# Altium PCB PCB1.PcbDoc
Units mm, origin at the board's own origin, x right, y up, seen from the top; angles counter-clockwise.
Board outline 152.4 x 101.6 mm, 2 copper layers (Top Layer, Bottom Layer); 32 components, 19 nets, 135 pads, 233 vias.
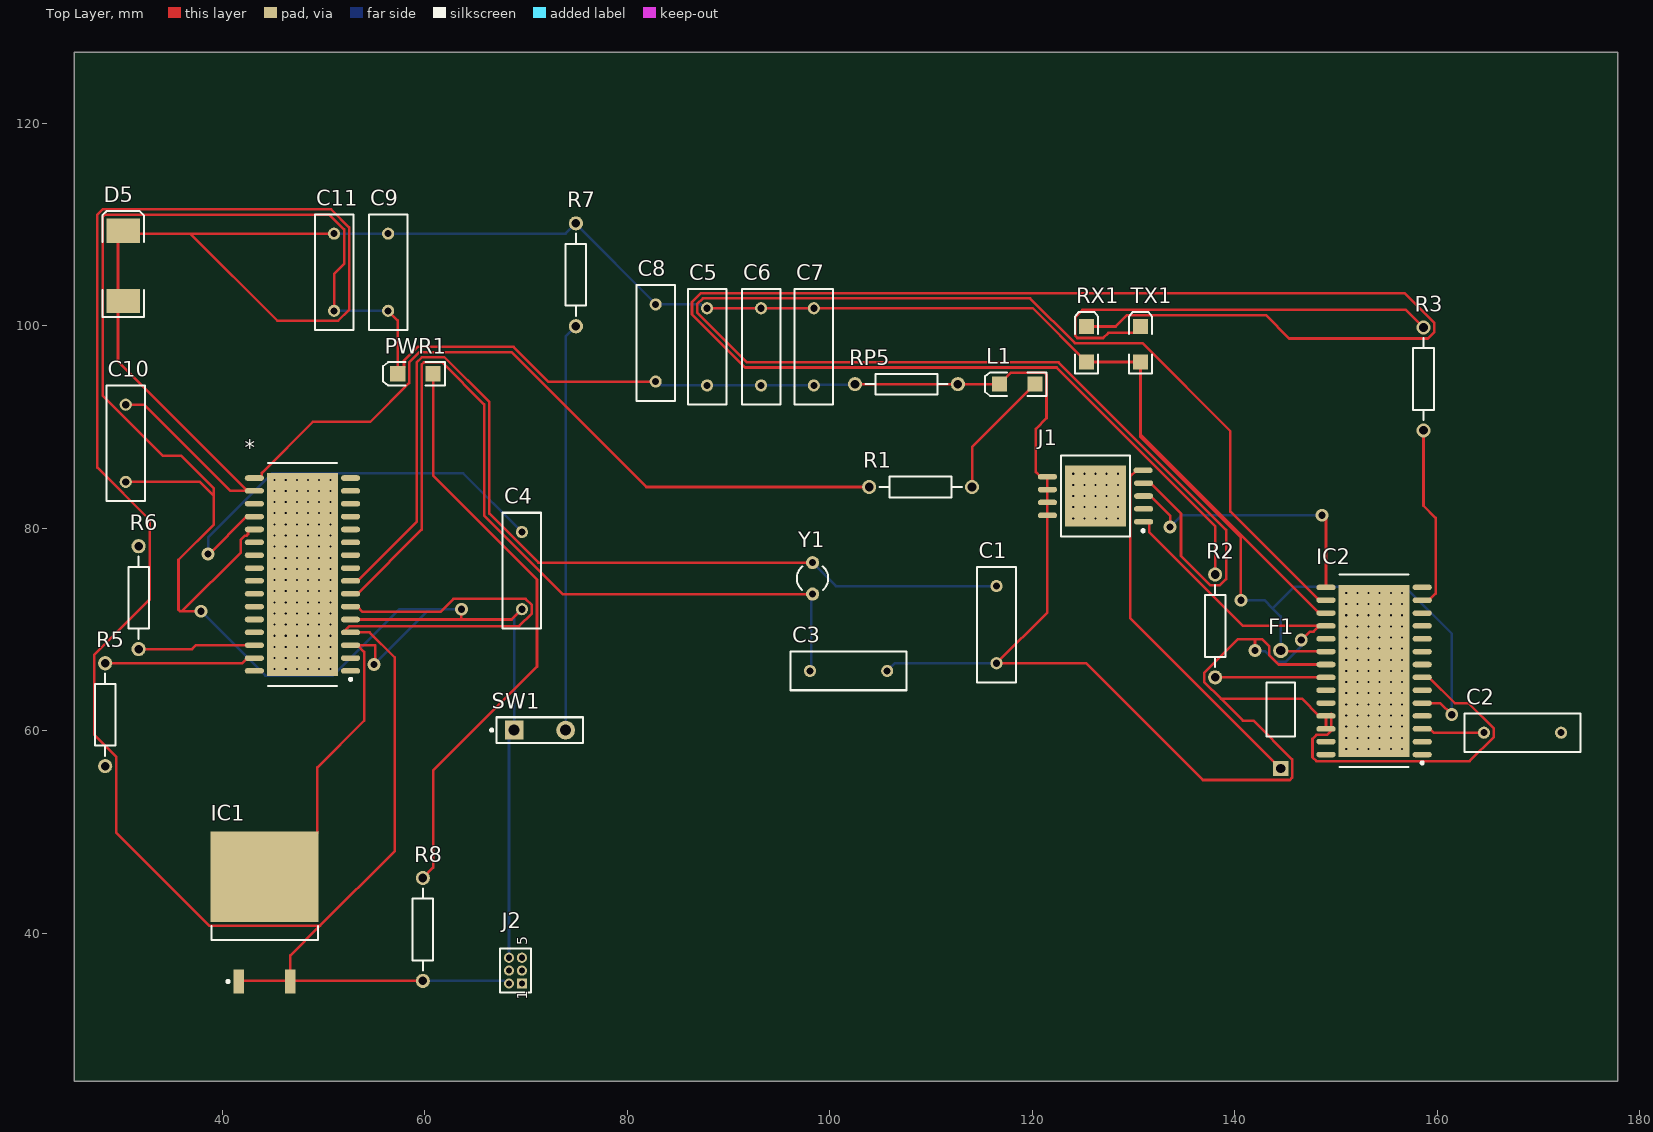
[diagram p0: Top Layer view]
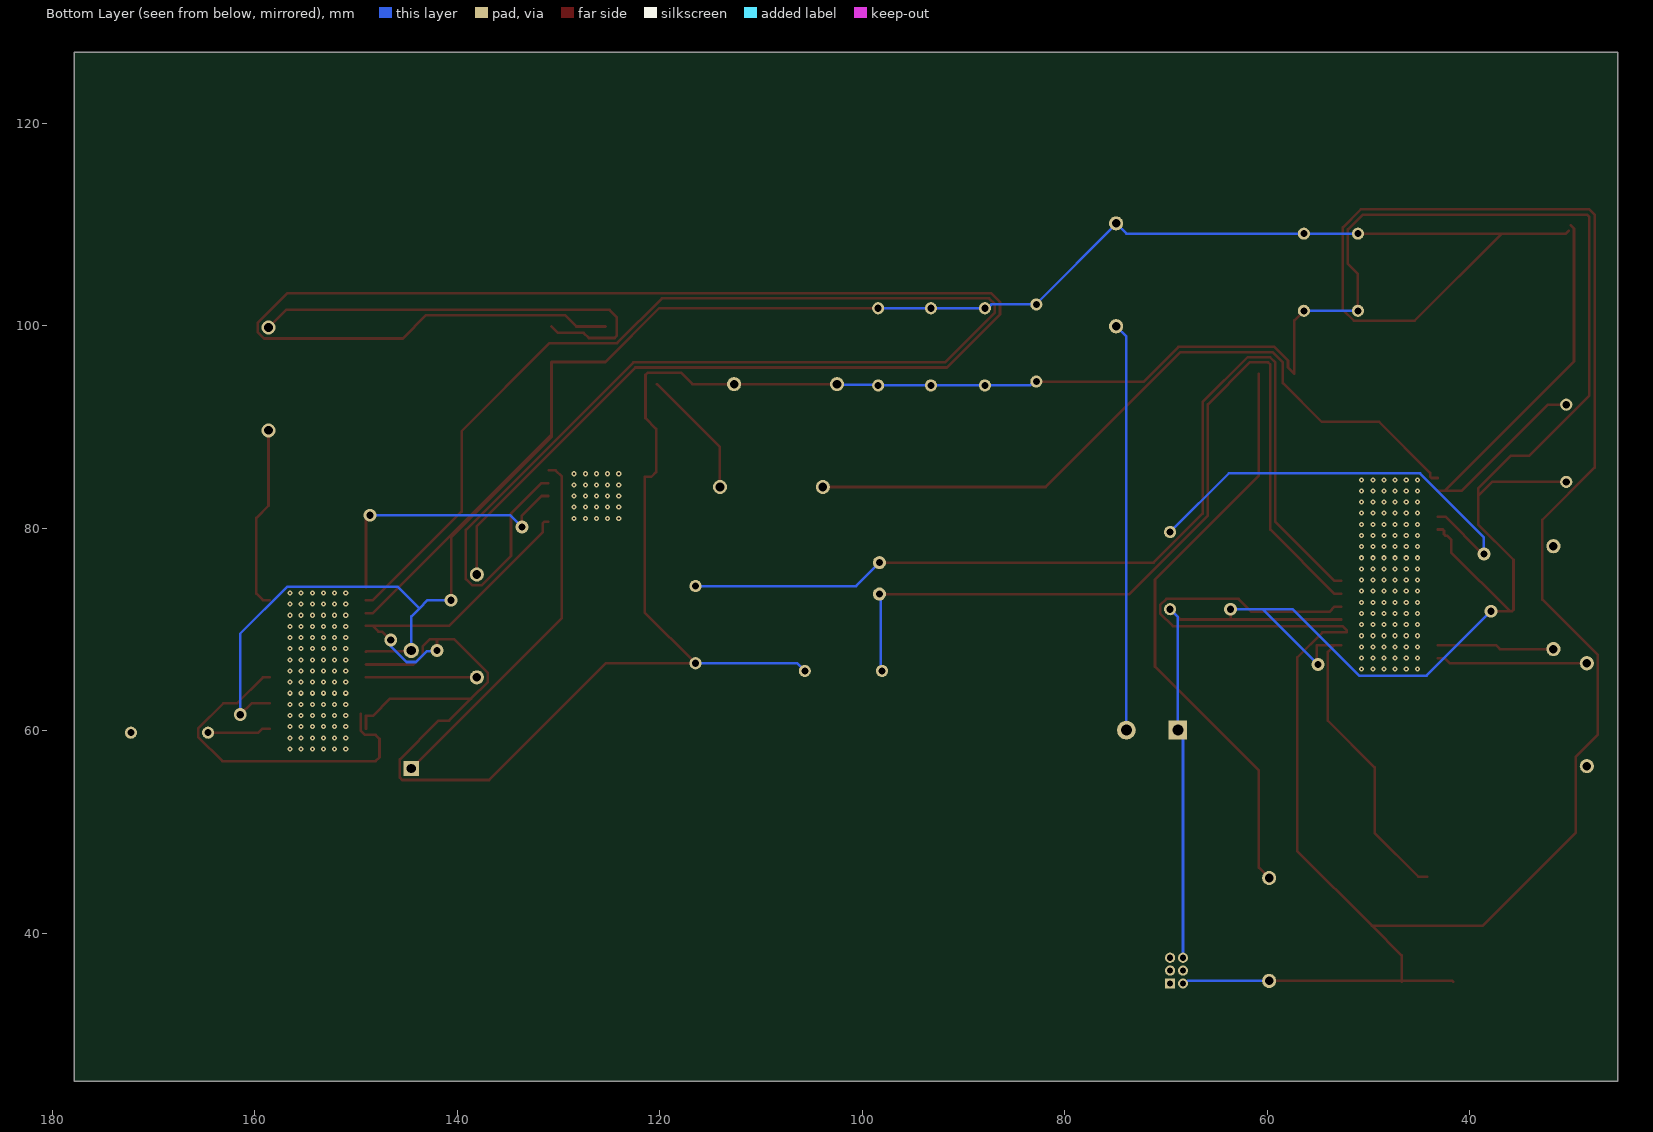
[diagram p1: Bottom Layer view, seen from below]

## Layer stack, top to bottom
Top Solder: solder mask 0.0102, Solder Resist, Dk 3.5
Top Layer: signal copper 0.0356
Dielectric 1: dielectric 0.32, FR-4, Dk 4.8
Bottom Layer: signal copper 0.0356
Bottom Solder: solder mask 0.0102, Solder Resist, Dk 3.5

## Board outline
25.4,25.4 177.8,25.4 177.8,127 25.4,127

## Design rules (kind name [scope] priority, off if disabled: settings)
Clearance "Stitching No Net_1" [IsStitchingVia and InNet('No Net') vs (IsVia and (Not IsStitchingVia)) Or IsPad] p1: gap=0.127 ignorepadtopadclearanceinfootprint=FALSE
Clearance "Stitching No Net" [IsStitchingVia and InNet('No Net') vs (IsVia and (Not IsStitchingVia)) Or IsPad] p2: gap=0.127 ignorepadtopadclearanceinfootprint=FALSE
Clearance [All] p3: gap=0.254 ignorepadtopadclearanceinfootprint=FALSE except(0: Arc-Hole Track-Hole SMDPad-Hole THPad-Hole Via-Hole Fill-Hole Poly-Hole Region-Hole Text-Hole)
MinimumSolderMaskSliver [All] p1: minsoldermaskwidth=0.025
PolygonConnect [All] p1: connectstyle=Relief reliefconductorwidth=0.254 reliefentries=4 polygonreliefangle="90 Angle" airgapwidth=0.254
RoutingVias [All] p1: holewidth=0.711 width=1.27 viastyle="Through Hole" minholewidth=0.711 minwidth=1.27 maxholewidth=0.711 maxwidth=1.27
SilkToSilkClearance [All] p1: silktosilkclearance=0.127
SilkToSolderMaskClearance [IsPad] p1: minsilkscreentomaskgap=0.127 clearancetoexposedcopper=TRUE
SolderMaskExpansion [All] p1: expansion=0.102 istentingtop=FALSE
Width [All] p1: maxlimit=0.254 minlimit=0.254 preferedwidth=0.254
27 further rules are at their usual default settings.

## Components (designator, comment, footprint, x,y, rotation, side; value= is the part's Value field where it differs from the comment)
* "ATMEGA328P-AU" SOIC127P980X95_HS-33N 47.93,75.438 r180 top
C1 "Cap" RAD-0.3 116.459,70.485 r90 top value=100pF
C2 "Cap" RAD-0.3 168.402,59.817 r180 top value=100pF
C3 "Cap" RAD-0.3 101.854,65.913 r180 top value=100pF
C4 "Cap" RAD-0.3 69.596,75.819 r90 top value=100pF
C5 "Cap" RAD-0.3 87.884,97.917 r90 top value=100pF
C6 "Cap" RAD-0.3 93.218,97.917 r90 top value=100pF
C7 "Cap" RAD-0.3 98.425,97.917 r90 top value=100pF
C8 "Cap" RAD-0.3 82.804,98.298 r90 top value=100pF
C9 "Cap" RAD-0.3 56.388,105.283 r90 top value=100pF
C10 "Cap" RAD-0.3 30.48,88.392 r90 top value=100pF
C11 "Cap" RAD-0.3 51.054,105.283 r90 top value=100pF
D5 "Diode" SMC 30.226,105.918 r90 top
F1 "Fuse 1" PIN-W2/E2.8 144.526,62.103 r90 top
IC1 "Volt Reg" D2PAK_N 44.196,42.043 r90 top
IC2 "Component_1" SOIC127P980X95_HS-29N 153.746,65.913 r180 top
J1 "MF-MSMF050-2" SOIC127P980X95_HS-10N 126.238,83.185 r180 top
J2 "MHDR2X3" MHDR2X3 69.596,35.052 r90 top
L1 "Yellow" 3.2X1.6X1.1 118.519,94.234 r180 top
PWR1 "GREEN" 3.2X1.6X1.1 59.083,95.25 r180 top
R1 "Res2" AXIAL-0.4 108.966,84.074 r180 top value=1K
R2 "Res2" AXIAL-0.4 138.049,70.358 r90 top value=1K
R3 "Res2" AXIAL-0.4 158.623,94.742 r90 top value=1K
R5 "Res2" AXIAL-0.4 28.448,61.595 r90 top value=1K
R6 "Res2" AXIAL-0.4 31.75,73.152 r270 top value=1K
R7 "Res2" AXIAL-0.4 74.93,105.029 r90 top value=1K
R8 "Res2" AXIAL-0.4 59.817,40.386 r90 top value=1K
RP5 "Res2" AXIAL-0.4 107.569,94.234 r180 top value=1K
RX1 "RED" 3.2X1.6X1.1 125.349,98.171 r90 top
SW1 "RESET" SPST-2 71.374,60.071 r0 top
TX1 "GREEN" 3.2X1.6X1.1 130.683,98.171 r90 top
Y1 "16MHz" R38 98.298,75.057 r180 top

## Footprints (in the part's own frame and the unit in brackets; to place one, negate y for a bottom-side part, rotate by r counter-clockwise, add the part's x,y. Pads: shape width x height; smd on the part's side, far side on the other; paste and mask are expansions set on the pad)
3.2X1.6X1.1 [mm] "SMT LED; 2 Flat Leads"
  rect 1.5x1.5 smd: 1(-1.75,0) 2(1.75,0)
  silkscreen extent -2.9,-1.15 3.2,1.15
AXIAL-0.4 [mm] "Axial Device, Thru-Hole; 2 Leads; 0.4 in Pin Spacing"
  round 1.4 hole 0.85: 1(-5.08,0) 2(5.08,0)
  silkscreen extent -4.06,-1.02 4.06,1.02
D2PAK_N [mm] "D2-PAK, 4-Leads, Body 8.8x10.4mm, Pitch 2.54mm, Lead Span 15.1mm, IPC Medium Density"
  rect 2.4x1.05 smd: 1(-6.8,2.54) 3(-6.8,-2.54)
  rect 8.9x10.65 smd: 2(3.55,0)
  silkscreen extent -6.92,-5.25 -1.3,5.25, body extent -2.7,-5.28 6.3,5.28, height 4.69
MHDR2X3 [mm] "Connector; Header; 3x2 Position"
  rect 1x1 hole 0.6: 1(0,0)
  round 1 hole 0.6: 2(0,1.27) 3(1.27,0) 4(1.27,1.27) 5(2.54,0) 6(2.54,1.27)
  silkscreen extent -0.9,-0.9 3.44,2.17
PIN-W2/E2.8 [mm] "Thru-Hole; 2 Leads"
  rect 1.5x1.5 hole 0.9: 1(-5.825,0)
  round 1.5 hole 0.9: 2(5.825,0)
  silkscreen extent -2.65,-1.4 2.65,1.4
R38 [mm] "Crystal, Thru-Hole; 2 Leads; Body 3.1 x 8.2 mm (Dia.xH)"
  round 1.3 hole 0.7: 1(0,1.55) 2(0,-1.55)
  silkscreen extent -1.55,-1.19 1.55,1.17
RAD-0.3 [mm] "Radial Cap, Thru-Hole; 2 Leads; 0.3 in Pin Spacing"
  round 1.2 hole 0.7: 1(-3.81,0) 2(3.81,0)
  silkscreen extent -5.71,-1.91 5.71,1.91
SMC [mm] "DO-214-AB/SMC; 2 C-Bend Leads; Body 7.9 x 5.9 mm, inc. leads (LxW)"
  rect 2.4x3.3 smd: 1(-3.475,0) 2(3.475,0)
  silkscreen extent -5.07,-2.05 5.43,2.05
SOIC127P980X95_HS-10N [mm] "SOIC, 9-Leads, Body 7.00x7.30mm, Pitch 1.27mm, Thermal Pad 6.00x6.00mm, IPC Medium Density"
  oval 1.9x0.55 smd: 1(-4.75,2.54) 2(-4.75,1.27) 3(-4.75,0) 4(-4.75,-1.27) 5(-4.699,-2.54) 6(4.75,-1.905) 7(4.75,-0.635) 8(4.75,0.635) 9(4.75,1.905)
  rect 6x6 smd: 10(0,0)
  silkscreen extent -4.82,-4 3.4,4, body extent -4.91,-4 4.91,4, height 1.05
SOIC127P980X95_HS-29N [mm] "SOIC, 28-Leads, Body 17.00x7.30mm, Pitch 1.27mm, Thermal Pad 17.00x7.00mm, IPC Medium Density"
  oval 1.9x0.55 smd: 1(-4.75,8.255) 2(-4.75,6.985) 3(-4.75,5.715) 4(-4.75,4.445) 5(-4.75,3.175) 6(-4.75,1.905) 7(-4.75,0.635) 8(-4.75,-0.635) 9(-4.75,-1.905) 10(-4.75,-3.175) 11(-4.75,-4.445) 12(-4.75,-5.715) 13(-4.75,-6.985) 14(-4.75,-8.255) 15(4.75,-8.255) 16(4.75,-6.985) 17(4.75,-5.715) 18(4.75,-4.445) 19(4.75,-3.175) 20(4.75,-1.905) 21(4.75,-0.635) 22(4.75,0.635) 23(4.75,1.905) 24(4.75,3.175) 25(4.75,4.445) 26(4.75,5.715) 27(4.75,6.985) 28(4.75,8.255)
  rect 7x17 smd: 29(0,0)
  silkscreen extent -4.88,-9.5 3.4,9.5, body extent -4.91,-9.5 4.91,9.5, height 1.05
SOIC127P980X95_HS-33N [mm] "SOIC, 32-Leads, Body 19.50x7.30mm, Pitch 1.27mm, Thermal Pad 20.00x7.00mm, IPC Medium Density"
  oval 1.9x0.55 smd: 1(-4.75,9.525) 2(-4.75,8.255) 3(-4.75,6.985) 4(-4.75,5.715) 5(-4.75,4.445) 6(-4.75,3.175) 7(-4.75,1.905) 8(-4.75,0.635) 9(-4.75,-0.635) 10(-4.75,-1.905) 11(-4.75,-3.175) 12(-4.75,-4.445) 13(-4.75,-5.715) 14(-4.75,-6.985) 15(-4.75,-8.255) 16(-4.75,-9.525) 17(4.75,-9.525) 18(4.75,-8.255) 19(4.75,-6.985) 20(4.75,-5.715) 21(4.75,-4.445) 22(4.75,-3.175) 23(4.75,-1.905) 24(4.75,-0.635) 25(4.75,0.635) 26(4.75,1.905) 27(4.75,3.175) 28(4.75,4.445) 29(4.75,5.715) 30(4.75,6.985) 31(4.75,8.255) 32(4.75,9.525)
  rect 7x20 smd: 33(0,0)
  silkscreen extent -4.88,-11 3.4,11, body extent -4.91,-11 4.91,11, height 1.05
SPST-2 [mm] "Switch; 2 Leads"
  rect 1.85x1.85 hole 1.1: 1(-2.54,0)
  round 1.85 hole 1.1: 2(2.54,0)
  silkscreen extent -4.89,-1.27 4.28,1.27

## Part data
C1 C2 C3 C4 C5 C6 C7 C8 C9 C10 C11: "Capacitor", LatestRevisionDate=17-Jul-2002, LatestRevisionNote="Re-released for DXP Platform.", PackageDescription="Radial Cap, Thru-Hole; 2 Leads; 0.3 in Pin Spacing", PackageReference=RAD-0.3, Published=8-Jun-2000, Publisher="Altium Limited"
D5: "Default Diode", Code_JEDEC=DO-214-AB, LatestRevisionDate=17-Jul-2002, LatestRevisionNote="Re-released for DXP Platform.", PackageDescription="DO-214-AB/SMC; 2 C-Bend Leads; Body 7.9 x 5.9 mm, inc. leads (LxW)", PackageReference=SMC, PackageVersion=Sep-1996, Published=8-Jun-2000, Publisher="Altium Limited"
F1: "Fuse", LatestRevisionDate=17-Jul-2002, LatestRevisionNote="Re-released for DXP Platform.", PackageDescription="Thru-Hole; 2 Leads", PackageReference=PIN-W2/E2.8, Published=8-Jun-2000, Publisher="Altium Limited"
IC1: "Voltage Regulator", LatestRevisionDate=29-May-2009, LatestRevisionNote="IPC-7351 Footprint Added.", PackageDescription="3-Pin Transistor Outline Package 2.54 mm Pitch, 15.1 mm Lead Span", PackageReference=D2PAK, Published=24-Mar-1999, Publisher="Altium Limited"
J2: "Header, 3-Pin, Dual row", LatestRevisionDate=17-Jul-2002, LatestRevisionNote="Re-released for DXP Platform.", Publisher="Altium Limited"
L1 PWR1 RX1 TX1: library part LED2, "Typical RED, GREEN, YELLOW, AMBER GaAs LED", LatestRevisionDate=17-Jul-2002, LatestRevisionNote="Re-released for DXP Platform.", PackageDescription="SM LED; 2 Flat Leads", PackageReference=3.2X1.6X1.1, PackageVersion=Feb-2002, Published=8-Jun-2000, Publisher="Altium Limited"
R1 R2 R3 R5 R6 R7 R8 RP5: "Resistor", LatestRevisionDate=17-Jul-2002, LatestRevisionNote="Re-released for DXP Platform.", PackageDescription="Axial Device, Thru-Hole; 2 Leads; 0.4 in Pin Spacing", PackageReference=AXIAL-0.4, Published=8-Jun-2000, Publisher="Altium Limited"
SW1: library part SW-PB, "Switch", LatestRevisionDate=17-Jul-2002, LatestRevisionNote="Re-released for DXP Platform.", PackageDescription="Switch; 2 Leads", PackageReference=SPST-2, Published=24-Mar-1999, Publisher="Altium Limited"
Y1: library part XTAL, "Crystal Oscillator", LatestRevisionDate=17-Jul-2002, LatestRevisionNote="Re-released for DXP Platform.", PackageDescription="Crystal, Thru-Hole; 2 Leads; Body 3.1 x 8.2 mm (Dia.xH)", PackageReference=R38, Published=8-Jun-2000, Publisher="Altium Limited"

## Via types
v1: diameter 0.5, hole 0.2, Top Layer to Bottom Layer, 223 vias
v2: diameter 1.27, hole 0.711, Top Layer to Bottom Layer, 10 vias

## Nets (pads, with @x,y where several pads share a name; then routed paths per layer and width w, separated by ;. In a path a pad name is that pad's centre, name@x,y a point inside that pad or via, vN(x,y) a via of type N, cw(c..) or ccw(c..) an arc to the next point about the centre after c; other vN are vias at no path point)
+5: *.4 *.6 *.18 C5.2 C6.2 C7.2 C8.2 C9.2 C10.2 C11.2 D5.1 D5.2 F1.2 IC1.1 IC1.3 IC2.5 IC2.17 IC2.20 J2.2 R7.2 R8.1 RX1.1 TX1.1 | length 514.6
  Top Layer w0.254: D5.2@30.016,109.901 29.718,109.603 29.718,96.48 *.18@42.505,83.693 ; D5.2 30.526,109.093 36.841,109.093 ; C10.2 32.298,92.202 40.807,83.693 *.18@42.505,83.693 ; IC1.1 41.719,35.306 IC1.3@46.736,35.306 ; *.18 *.18@42.505,83.693 ; IC1.3 IC1.3@46.736,35.306 ; C11.2 36.841,109.093 ; *.6 53.355,72.263 53.863,71.755 61.566,71.755 62.836,73.025 69.967,73.025 70.577,72.415 70.577,71.603 69.311,70.337 52.576,70.337 52.172,69.933 52.172,69.723 54.566,69.723 57.023,67.266 57.023,48.106 49.679,40.762 ; R8.1 IC1.3@46.736,35.306 ; C5.2 C6.2 C7.2 120.043,101.727 RX1.1 TX1.1 130.683,89.266 ; v2(140.589,72.898) 140.589,79.113 130.683,89.019 130.683,89.266 ; F1.2 144.581,67.873 148.941,67.873 IC2.20 ; IC2.17 148.321,71.628 130.683,89.266 ; IC2.5 160.274,62.738 v2(161.417,61.595) ; 36.841,109.093 45.442,100.492 51.46,100.492 52.543,101.575 52.543,109.71 50.771,111.482 28.208,111.482 27.687,110.961 27.687,85.988 32.831,80.844 32.831,72.962 27.367,67.498 27.367,59.615 29.529,57.453 29.529,49.946 38.713,40.762 49.679,40.762 ; IC1.3@46.736,35.306 46.736,37.819 49.679,40.762
  Bottom Layer w0.254: C11.2 C9.2 73.914,109.093 R7.2 74.93,110.045 82.804,102.171 C8.2 87.247,102.108 87.628,101.727 C5.2 C6.2 C7.2 ; R8.1 67.87,35.306 68.124,35.052 J2.2 ; v2(140.589,72.898) 142.915,72.898 143.72,72.092 ; F1.2 144.526,71.287 143.72,72.092 ; v2(161.417,61.595) 161.417,69.584 156.757,74.244 145.872,74.244 143.72,72.092
GND: *.3 *.5 *.21 C1.1 C3.1 C4.1 C5.1 C6.1 C7.1 C8.1 C9.1 C10.1 C11.1 IC1.2 IC2.7 IC2.18 IC2.21 IC2.25 IC2.26 J1.1 J1.6 J1.7 J1.8 J1.9 J2.6 L1.2 PWR1.2 RP5.1 RP5.2 SW1.1 | length 491.8
  Top Layer w0.254: C10.1 37.806,84.582 39.188,83.2 ; v2@37.973,71.882 v2(37.903,71.812) 36.046,71.812 ; *.21 42.687,79.883 42.55,79.746 42.55,79.418 42.402,79.269 42.233,79.269 41.849,78.885 41.849,77.615 36.046,71.812 ; IC1.2 45.071,45.593 49.394,49.916 49.394,56.377 54.011,60.994 54.011,67.797 *.3@53.355,68.453 ; C11.1 51.054,105.124 52.035,106.105 52.035,109.499 50.56,110.974 28.418,110.974 28.195,110.751 28.195,93.1 34.116,87.179 35.928,87.179 39.188,83.918 39.188,83.2 ; *.3 *.3@53.355,68.453 ; *.5 63.5,70.993 ; v2(54.991,66.548) 55.118,66.675 55.118,68.453 *.3@53.355,68.453 ; C9.1 57.333,100.528 PWR1.2 57.956,95.873 57.956,96.567 59.294,97.905 68.766,97.905 72.183,94.488 C8.1 ; v2(63.627,72.009) 63.627,71.12 63.5,70.993 ; C4.1 68.58,70.993 63.5,70.993 ; RP5.2 RP5.1 L1.2 117.9,95.365 121.177,95.365 121.4,95.142 121.4,90.873 120.349,89.822 120.349,85.554 120.813,85.09 J1.6 J1.7 J1.8 J1.9 121.488,71.704 C1.1 125.31,66.675 136.838,55.147 145.434,55.147 145.657,55.37 145.657,57.186 141.835,61.008 140.79,61.008 138.621,63.177 ; J1.1 131.399,80.645 131.536,80.508 131.536,79.625 140.803,70.358 IC2.18@148.321,70.358 ; v2(141.986,67.945) 141.986,69.059 ; v2(146.558,68.961) 147.394,69.797 147.76,69.797 IC2.18@148.321,70.358 ; IC2.26 IC2.25 148.321,61.468 146.612,63.177 138.621,63.177 ; IC2.21 144.307,66.548 143.395,67.46 143.395,68.341 142.677,69.059 141.986,69.059 ; IC2.18 IC2.18@148.321,70.358 ; IC2.25@149.504,61.678 149.504,59.988 149.11,59.594 148.059,59.594 147.665,59.2 147.665,57.386 148.049,57.002 163.164,57.002 165.573,59.411 165.573,60.223 163.074,62.722 161.727,62.722 159.171,65.278 IC2.7 ; 36.046,71.812 35.836,71.812 35.687,71.961 35.687,76.892 39.188,80.393 39.188,83.2 ; 138.621,63.177 136.968,64.83 136.968,65.726 140.301,69.059 141.986,69.059
  Bottom Layer w0.254: v2(37.903,71.812) 44.258,65.457 50.941,65.457 57.493,72.009 60.452,72.009 ; C11.1 C9.1 ; v2(54.991,66.548) 60.452,72.009 ; v2(63.627,72.009) 60.452,72.009 ; J2.6 68.326,59.563 SW1.1 68.834,71.247 C4.1 ; C8.1 83.06,94.488 83.441,94.107 C5.1 C6.1 C7.1 98.489,94.17 102.425,94.17 RP5.2 ; C3.1 106.426,66.675 C1.1 ; v2(141.986,67.945) 142.078,67.853 143.002,67.853 144.058,66.797 144.994,66.797 146.558,68.361 v2@146.558,68.707
Net*_7: *.7 C3.2 Y1.1 | length 88.2
  Top Layer w0.254: *.7 53.355,73.533 59.702,79.88 59.702,96.158 59.925,96.381 61.741,96.381 65.878,92.244 65.878,81.242 73.612,73.507 Y1.1
  Bottom Layer w0.254: C3.2 98.171,66.04 98.171,73.38 Y1.1
Net*_8: *.8 C1.2 Y1.2 | length 97.9
  Top Layer w0.254: *.8 53.355,74.803 59.194,80.642 59.194,96.368 59.715,96.889 61.951,96.889 66.386,92.455 66.386,81.452 71.231,76.607 Y1.2
  Bottom Layer w0.254: Y1.2 100.61,74.295 C1.2
Net*_17: *.17 R1.2 | length 72.8
  Top Layer w0.254: *.17 43.775,84.963 43.912,85.1 43.912,85.458 48.973,90.519 54.641,90.519 58.464,94.342 58.464,96.357 59.504,97.397 68.556,97.397 81.879,84.074 R1.2
Net*_20: *.20 C4.2 | length 43.7
  Top Layer w0.254: v2(38.608,77.47) 38.742,77.47 42.425,81.153 *.20
  Bottom Layer w0.254: v2(38.608,77.47) 38.608,79.108 44.919,85.419 63.806,85.419 C4.2
Net*_30: *.30 R6.2 | length 11.6
  Top Layer w0.254: R6.2 37.024,68.072 37.405,68.453 *.30
Net*_31: *.31 R5.2 | length 14.9
  Top Layer w0.254: R5.2 41.997,66.675 42.505,67.183 *.31
NetC2_2: C2.2 IC2.3 | length 6.3
  Top Layer w0.254: IC2.3 159.251,60.198 159.632,59.817 C2.2
NetF1_1: F1.1 J1.5 | length 36.5
  Top Layer w0.254: J1.5 130.262,85.725 129.657,85.12 129.657,71.147 F1.1
NetIC2_13: IC2.13 R3.1 | length 18.2
  Top Layer w0.254: IC2.13 159.171,72.898 159.827,73.554 159.827,81.022 158.623,82.226 R3.1
NetIC2_15: IC2.15 J1.3 | length 27.3
  Top Layer w0.254: J1.3 131.663,83.185 133.604,81.244 v2(133.604,80.137) ; v2(148.59,81.28) 148.996,80.874 IC2.15
  Bottom Layer w0.254: v2(133.604,80.137) 134.747,81.28 v2(148.59,81.28)
NetIC2_16: IC2.16 J1.4 | length 161.1
  Top Layer w0.254: J1.4 131.663,84.455 134.68,81.438 134.68,77.278 137.601,74.357 138.497,74.357 139.13,74.99 139.13,79.853 122.602,96.381 91.843,96.381 86.903,101.321 86.903,102.133 87.478,102.708 119.78,102.708 124.206,98.282 130.861,98.282 139.563,89.58 139.563,81.656 148.321,72.898 IC2.16
NetIC2_22: IC2.22 R2.1 | length 10.9
  Top Layer w0.254: R2.1 IC2.22
NetL1_1: L1.1 R1.1 | length 12.7
  Top Layer w0.254: R1.1 114.046,88.011 L1.1
NetPWR1_1: PWR1.1 R8.2 | length 58.7
  Top Layer w0.254: R8.2 60.833,46.482 60.833,56.096 71.085,66.348 71.085,74.946 60.833,85.198 PWR1.1
NetR2_2: R2.2 RX1.2 | length 178.1
  Top Layer w0.254: RX1.2 128.216,99.921 129.347,101.052 143.053,101.052 145.364,98.741 159.071,98.741 159.704,99.374 159.704,100.27 156.758,103.216 87.267,103.216 86.395,102.344 86.395,101.11 91.632,95.873 122.392,95.873 138.049,80.216 R2.2
NetR3_2: R3.2 TX1.2 | length 44.3
  Top Layer w0.254: TX1.2 130.06,99.298 127.505,99.298 126.997,98.79 124.441,98.79 124.218,99.013 124.218,100.829 124.949,101.56 156.885,101.56 R3.2
NetR7_1: R7.1 SW1.2 | length 40.3
  Bottom Layer w0.254: SW1.2 73.914,98.933 R7.1
pads on no net: *.1 *.2 *.9 *.10 *.11 *.12 *.13 *.14 *.15 *.16 *.19 *.22 *.23 *.24 *.25 *.26 *.27 *.28 *.29 *.32 *.33 C2.1 IC2.1 IC2.2 IC2.4 IC2.6 IC2.8 IC2.9 IC2.10 IC2.11 IC2.12 IC2.14 IC2.19 IC2.23 IC2.24 IC2.27 IC2.28 IC2.29 J1.2 J1.10 J2.1 J2.3 J2.4 J2.5 R5.1 R6.1
copper on no net:
  other v1: 150.996,58.213 152.096,58.213 153.196,58.213 154.296,58.213 155.396,58.213 156.496,58.213 150.996,59.313 152.096,59.313 153.196,59.313 154.296,59.313 155.396,59.313 156.496,59.313 150.996,60.413 152.096,60.413 153.196,60.413 154.296,60.413 155.396,60.413 156.496,60.413 150.996,61.513 152.096,61.513 153.196,61.513 154.296,61.513 155.396,61.513 156.496,61.513 150.996,62.613 152.096,62.613 153.196,62.613 154.296,62.613 155.396,62.613 156.496,62.613 150.996,63.713 152.096,63.713 153.196,63.713 154.296,63.713 155.396,63.713 156.496,63.713 150.996,64.813 152.096,64.813 153.196,64.813 154.296,64.813 155.396,64.813 156.496,64.813 150.996,65.913 152.096,65.913 153.196,65.913 154.296,65.913 155.396,65.913 156.496,65.913 45.18,66.088 46.28,66.088 47.38,66.088 48.48,66.088 49.58,66.088 50.68,66.088 150.996,67.013 152.096,67.013 153.196,67.013 154.296,67.013 155.396,67.013 156.496,67.013 45.18,67.188 46.28,67.188 47.38,67.188 48.48,67.188 49.58,67.188 50.68,67.188 150.996,68.113 152.096,68.113 153.196,68.113 154.296,68.113 155.396,68.113 156.496,68.113 45.18,68.288 46.28,68.288 47.38,68.288 48.48,68.288 49.58,68.288 50.68,68.288 150.996,69.213 152.096,69.213 153.196,69.213 154.296,69.213 155.396,69.213 156.496,69.213 45.18,69.388 46.28,69.388 47.38,69.388 48.48,69.388 49.58,69.388 50.68,69.388 150.996,70.313 152.096,70.313 153.196,70.313 154.296,70.313 155.396,70.313 156.496,70.313 45.18,70.488 46.28,70.488 47.38,70.488 48.48,70.488 49.58,70.488 50.68,70.488 150.996,71.413 152.096,71.413 153.196,71.413 154.296,71.413 155.396,71.413 156.496,71.413 45.18,71.588 46.28,71.588 47.38,71.588 48.48,71.588 49.58,71.588 50.68,71.588 150.996,72.513 152.096,72.513 153.196,72.513 154.296,72.513 155.396,72.513 156.496,72.513 45.18,72.688 46.28,72.688 47.38,72.688 48.48,72.688 49.58,72.688 50.68,72.688 150.996,73.613 152.096,73.613 153.196,73.613 154.296,73.613 155.396,73.613 156.496,73.613 45.18,73.788 46.28,73.788 47.38,73.788 48.48,73.788 49.58,73.788 50.68,73.788 45.18,74.888 46.28,74.888 47.38,74.888 48.48,74.888 49.58,74.888 50.68,74.888 45.18,75.988 46.28,75.988 47.38,75.988 48.48,75.988 49.58,75.988 50.68,75.988 45.18,77.088 46.28,77.088 47.38,77.088 48.48,77.088 49.58,77.088 50.68,77.088 45.18,78.188 46.28,78.188 47.38,78.188 48.48,78.188 49.58,78.188 50.68,78.188 45.18,79.288 46.28,79.288 47.38,79.288 48.48,79.288 49.58,79.288 50.68,79.288 45.18,80.388 46.28,80.388 47.38,80.388 48.48,80.388 49.58,80.388 50.68,80.388 124.038,80.985 125.138,80.985 126.238,80.985 127.338,80.985 128.438,80.985 45.18,81.488 46.28,81.488 47.38,81.488 48.48,81.488 49.58,81.488 50.68,81.488 124.038,82.085 125.138,82.085 126.238,82.085 127.338,82.085 128.438,82.085 45.18,82.588 46.28,82.588 47.38,82.588 48.48,82.588 49.58,82.588 50.68,82.588 124.038,83.185 125.138,83.185 126.238,83.185 127.338,83.185 128.438,83.185 45.18,83.688 46.28,83.688 47.38,83.688 48.48,83.688 49.58,83.688 50.68,83.688 124.038,84.285 125.138,84.285 126.238,84.285 127.338,84.285 128.438,84.285 45.18,84.788 46.28,84.788 47.38,84.788 48.48,84.788 49.58,84.788 50.68,84.788 124.038,85.385 125.138,85.385 126.238,85.385 127.338,85.385 128.438,85.385

## Text inside footprints (layer, text, board x,y; h text height)
J2: Top Overlay "5" at 70.104,38.852 h1 r90; Top Overlay "1" at 70.104,33.452 h1 r90